# EAGLE board Adapter_v1.0B (EAGLE 7.2.0)
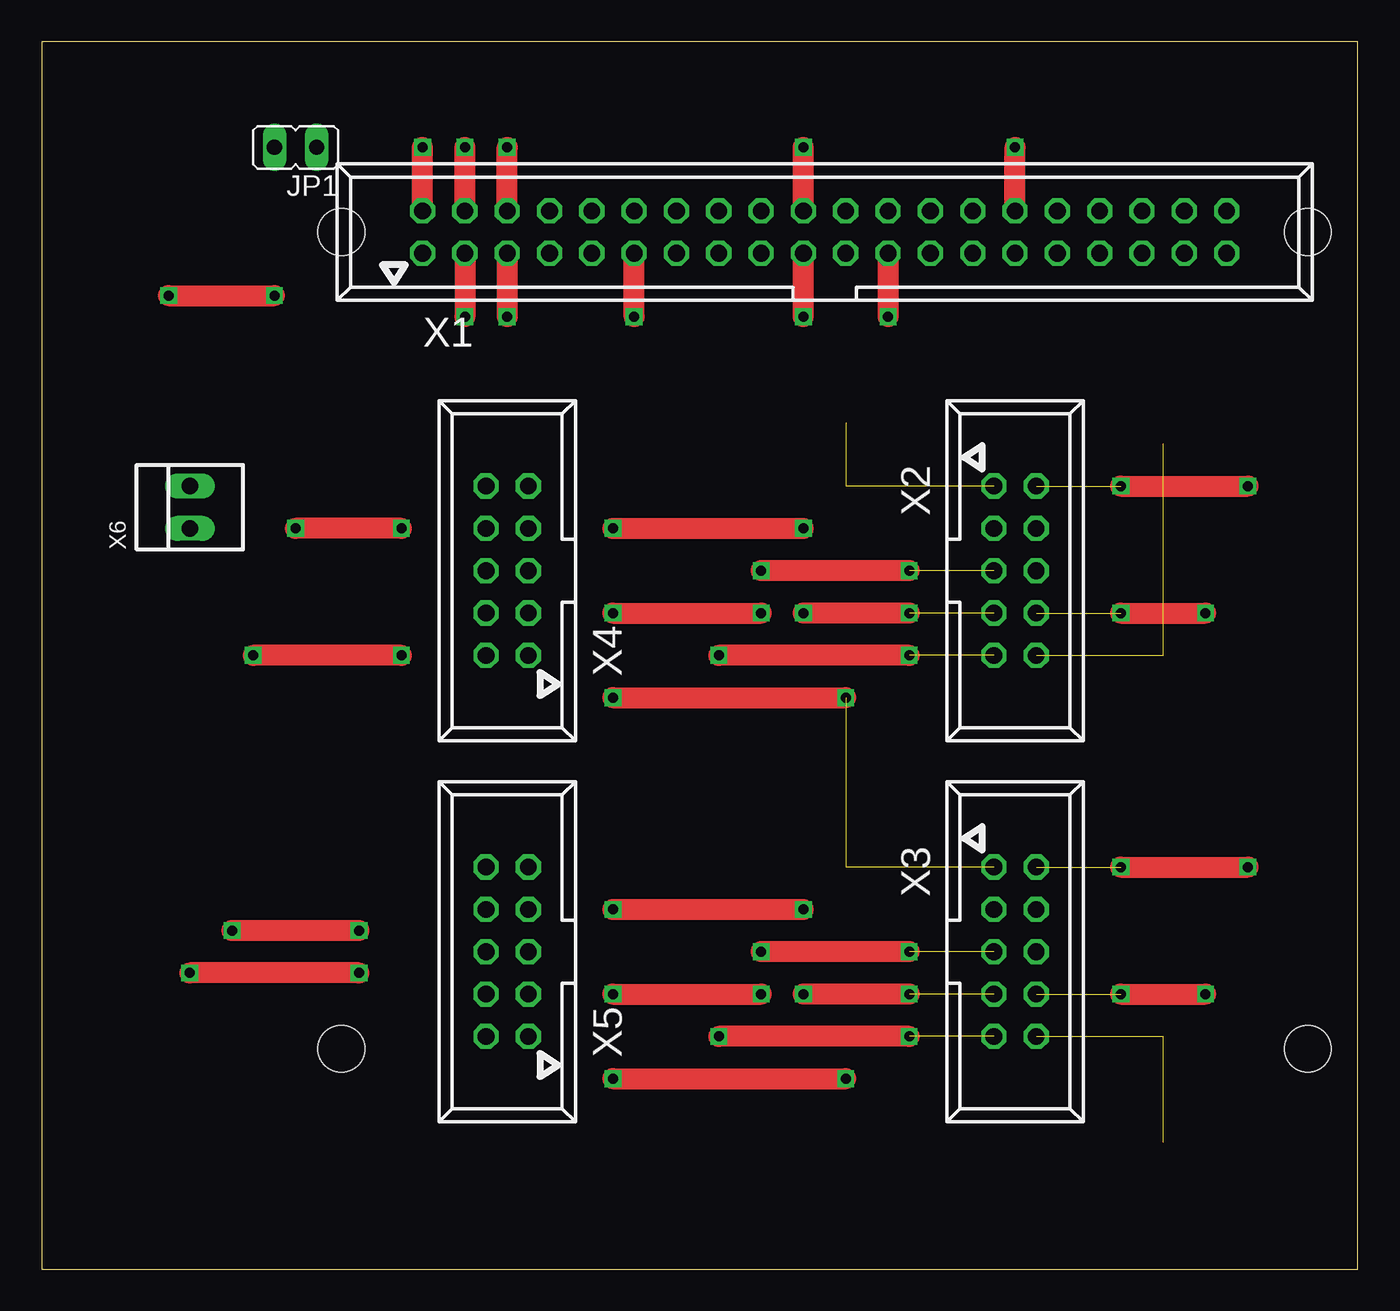
[diagram p0: board, top side]
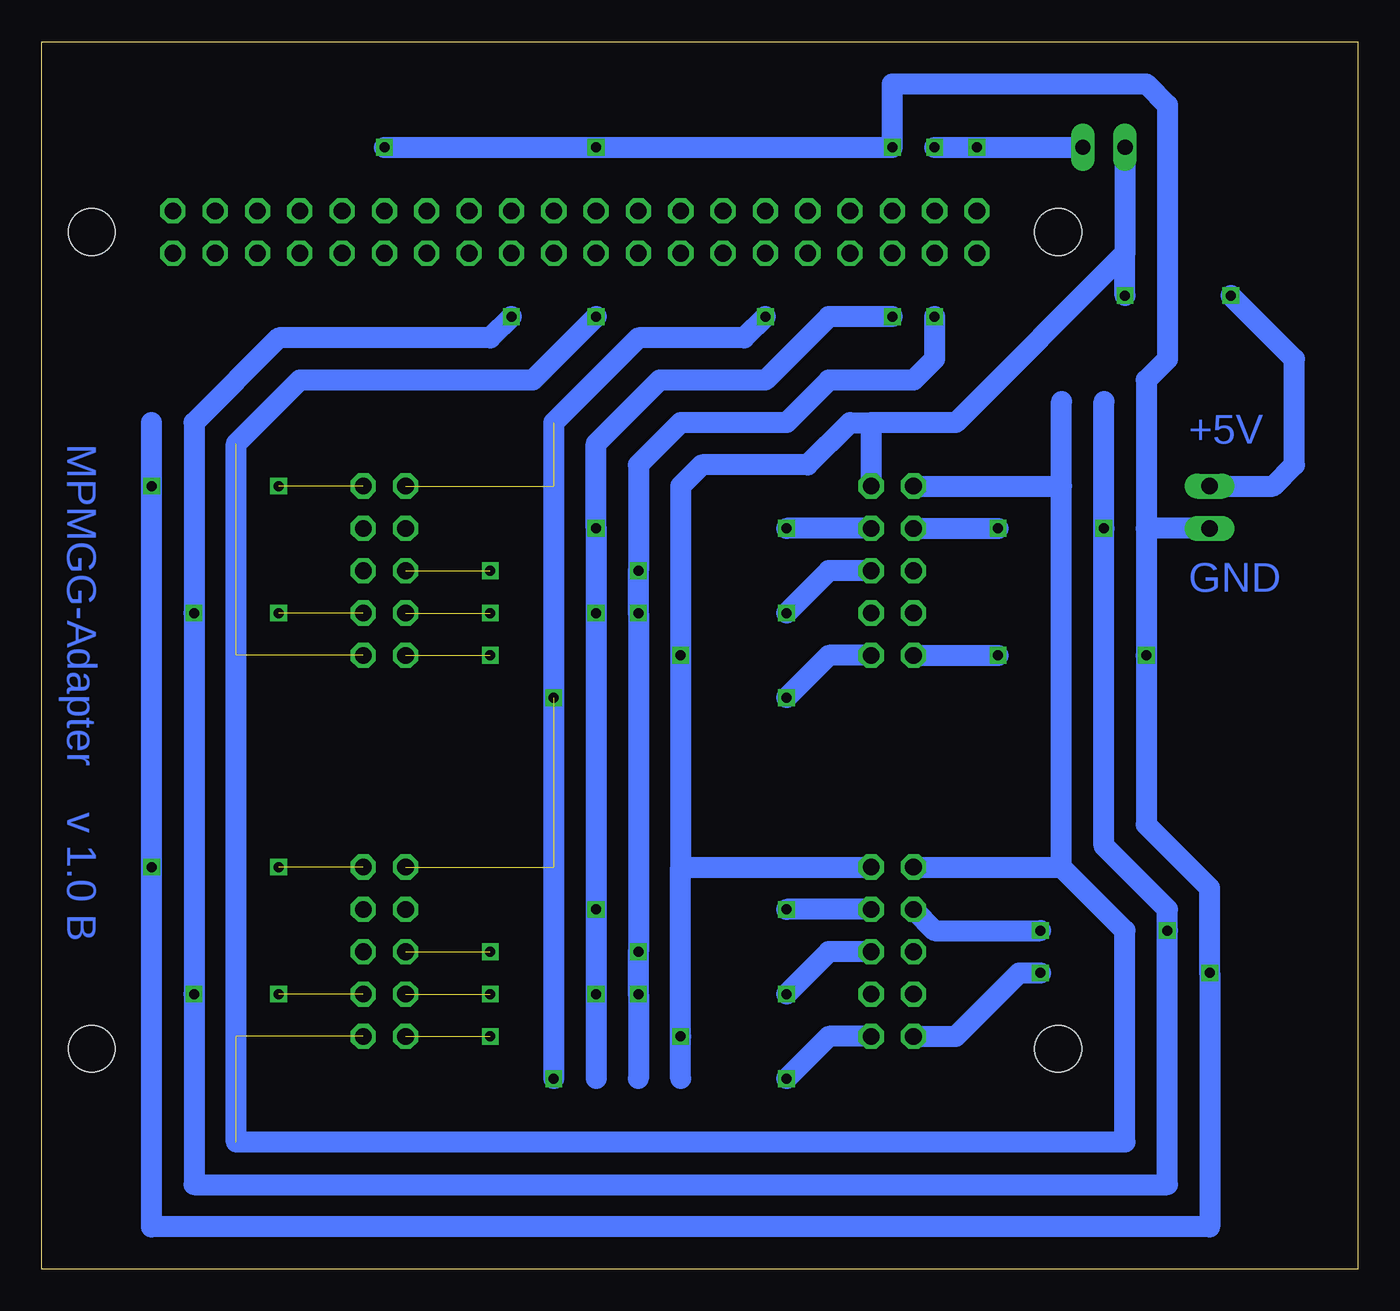
[diagram p1: board, bottom side, seen from below]

Size 78.99 x 73.65 mm. Coordinates in mm from the lower left corner, seen from the top.
Outline: 0,0 78.99,0 78.99,73.65 0,73.65 0,0
Copper layers (1*16): Top 0.035mm / dielectric 1.5mm / Bottom 0.035mm
Design rules "default": minimum track width 10mil, minimum drill 24mil, track to track 8mil, track to pad 8mil, pad to pad 8mil, via to via 8mil, smd to smd 8mil, copper to edge 40mil, drill to drill 8mil, minimum pad ring 10mil, minimum via ring 8mil, stop-mask expansion 4mil, vias tented up to drill 0mil, thermal gap 10mil
Holes 2.8 mm at 75.99,62.23 17.99,62.23 17.99,13.23 17.99,13.23 75.99,13.23

## Footprints (pad centres in the part's own frame; a part is rotated, then mirrored left to right if it is on the bottom)
JP1 = drill 0.914 long: 1 0,-1.27; 2 0,1.27
057-040-1 = drill 1 octagon: 1 -24.13,-1.27; 2 -24.13,1.27; 3 -21.59,-1.27; 4 -21.59,1.27; 5 -19.05,-1.27; 6 -19.05,1.27; 7 -16.51,-1.27; 8 -16.51,1.27; 9 -13.97,-1.27; 10 -13.97,1.27; 11 -11.43,-1.27; 12 -11.43,1.27; 13 -8.89,-1.27; 14 -8.89,1.27; 15 -6.35,-1.27; 16 -6.35,1.27; 17 -3.81,-1.27; 18 -3.81,1.27; 19 -1.27,-1.27; 20 -1.27,1.27; 21 1.27,-1.27; 22 1.27,1.27; 23 3.81,-1.27; 24 3.81,1.27; 25 6.35,-1.27; 26 6.35,1.27; 27 8.89,-1.27; 28 8.89,1.27; 29 11.43,-1.27; 30 11.43,1.27; 31 13.97,-1.27; 32 13.97,1.27; 33 16.51,-1.27; 34 16.51,1.27; 35 19.05,-1.27; 36 19.05,1.27; 37 21.59,-1.27; 38 21.59,1.27; 39 24.13,-1.27; 40 24.13,1.27
057-010-1 = drill 1 octagon: 1 -5.08,-1.27; 2 -5.08,1.27; 3 -2.54,-1.27; 4 -2.54,1.27; 5 0,-1.27; 6 0,1.27; 7 2.54,-1.27; 8 2.54,1.27; 9 5.08,-1.27; 10 5.08,1.27
22-23-2021 = drill 1 long: 1 -1.27,0; 2 1.27,0

## Placement (x,y rotation side)
JP1  [JP1]  15.24,67.31 90 top
X1  057-040-1  [057-040-1]  46.99,62.23 0 top
X2  057-010-1  [057-010-1]  58.42,41.91 270 top
X3  057-010-1  [057-010-1]  58.42,19.05 270 top
X4  057-010-1  [057-010-1]  27.94,41.91 90 top
X5  057-010-1  [057-010-1]  27.94,19.05 90 top
X6  22-23-2021  [22-23-2021]  8.89,45.72 90 top

## Library data of the parts
JP1 = jumper
X1-X5 = con-panduit; OC_FARNELL: unknown; OC_NEWARK: unknown
X6 = con-molex; MF: MOLEX; MPN: 22-23-2021; OC_FARNELL: 1462926; OC_NEWARK: 25C3832

## Nets
+5V: JP1.2 X2.9 X3.9 X4.9 X5.9 X6.2
GND: X1.6 X1.20 X1.30 X2.2 X3.2 X4.2 X5.2 X6.1
I2C-CLK: X1.5 X2.7 X3.7 X4.7 X5.7
I2C-DATA: X1.3 X2.5 X3.5 X4.5 X5.5
N$1: JP1.1 X1.2 X1.4
RST: X1.11 X2.1 X3.1 X4.1 X5.1
SPI-SCL: X1.23 X2.8 X3.8 X4.8 X5.8
SPI-SDA: X1.19 X2.10 X3.10 X4.10 X5.10

## Tracks (layer width: path | path; a pad name or v marks a point on that pad's centre or on a via)
+5V  (via drill 0.6)  (2 unrouted)
  Top 1.27: v52.07,36.83 v40.64,36.83 | v52.07,13.97 v40.64,13.97 | v7.62,58.42 v13.97,58.42
  Bottom 1.27: 40.64,24.13 v40.64,36.83 40.64,46.99 39.37,48.26 33.02,48.26 30.48,50.8 29.21,50.8 | 40.64,11.43 v40.64,13.97 40.64,24.13 | 40.64,24.13 X5.9 | X6.2 5.08,46.99 3.81,48.26 3.81,54.61 v7.62,58.42 | v13.97,58.42 13.97,60.96 | JP1.2 13.97,60.96 | 13.97,60.96 24.13,50.8 29.21,50.8 | 29.21,50.8 X4.9
GND  (via drill 0.6)  (2 unrouted)
  Top 1.27: X1.30 v58.42,67.31 | X1.20 v45.72,67.31 | X1.6 v27.94,67.31 | v21.59,36.83 v12.7,36.83 | v19.05,17.78 v8.89,17.78 | v64.77,24.13 v72.39,24.13 | v64.77,46.99 v72.39,46.99
  Bottom 1.27: v58.42,67.31 v45.72,67.31 v27.94,67.31 27.94,71.12 12.7,71.12 11.43,69.85 11.43,54.61 12.7,53.34 12.7,44.45 | 12.7,44.45 v12.7,36.83 12.7,26.67 8.89,22.86 v8.89,17.78 8.89,2.54 72.39,2.54 v72.39,24.13 v72.39,46.99 72.39,50.8 | X6.1 12.7,44.45 | X4.2 v21.59,36.83 | X5.2 24.13,13.97 20.32,17.78 v19.05,17.78
I2C-CLK  (via drill 0.6)  (2 unrouted)
  Top 1.27: X1.5 v27.94,57.15 | v34.29,44.45 v45.72,44.45 | v52.07,39.37 v45.72,39.37 | v52.07,16.51 v45.72,16.51 | v34.29,21.59 v45.72,21.59
  Bottom 1.27: v27.94,57.15 31.75,57.15 35.56,53.34 41.91,53.34 45.72,49.53 v45.72,44.45 v45.72,39.37 v45.72,21.59 v45.72,16.51 45.72,11.43 | X4.7 v34.29,44.45 | X5.7 v34.29,21.59
I2C-DATA  (via drill 0.6)  (2 unrouted)
  Top 1.27: X1.3 v25.4,57.15 | v52.07,41.91 v43.18,41.91 | v34.29,39.37 v43.18,39.37 | v52.07,19.05 v43.18,19.05 | v34.29,16.51 v43.18,16.51
  Bottom 1.27: v25.4,57.15 25.4,54.61 26.67,53.34 31.75,53.34 34.29,50.8 40.64,50.8 43.18,48.26 v43.18,41.91 v43.18,39.37 v43.18,19.05 v43.18,16.51 43.18,11.43 | X4.5 31.75,41.91 v34.29,39.37 | X5.5 31.75,19.05 v34.29,16.51
N$1  (via drill 0.6)
  Top 1.27: X1.2 v22.86,67.31 | X1.4 v25.4,67.31
  Bottom 1.27: JP1.1 v22.86,67.31 v25.4,67.31
RST  (via drill 0.6)  (4 unrouted)
  Top 1.27: v34.29,34.29 v48.26,34.29 | v34.29,11.43 v48.26,11.43 | v35.56,57.15 X1.11
  Bottom 1.27: v48.26,11.43 v48.26,34.29 48.26,50.8 43.18,55.88 36.83,55.88 v35.56,57.15 | X4.1 31.75,36.83 v34.29,34.29 | X5.1 31.75,13.97 v34.29,11.43
SPI-SCL  (via drill 0.6)  (2 unrouted)
  Top 1.27: X1.23 v50.8,57.15 | v19.05,20.32 v11.43,20.32 | v21.59,44.45 v15.24,44.45 | v64.77,16.51 v69.85,16.51 | v64.77,39.37 v69.85,39.37
  Bottom 1.27: v50.8,57.15 52.07,55.88 64.77,55.88 69.85,50.8 v69.85,39.37 v69.85,16.51 69.85,5.08 11.43,5.08 v11.43,20.32 11.43,21.59 15.24,25.4 v15.24,44.45 15.24,52.07 | X5.8 25.4,20.32 v19.05,20.32 | X4.8 v21.59,44.45
SPI-SDA  (via drill 0.6)  (4 unrouted)
  Top 1.27: v45.72,57.15 X1.19
  Bottom 1.27: 17.78,24.13 13.97,20.32 13.97,7.62 67.31,7.62 67.31,49.53 63.5,53.34 49.53,53.34 v45.72,57.15 | 17.78,24.13 17.78,46.99 | 17.78,46.99 17.78,52.07 | X4.10 17.78,46.99 | X5.10 17.78,24.13

## Text on the board
Bottom: +5V | MPMGG-Adapter v 1.0 B | GND